# EAGLE board CT_schematic (EAGLE 7.6.0)

Size 100 x 80 mm. Coordinates in mm from the lower left corner, seen from the top.
Outline: 0,0 100,0 100,80 0,80 0,0
Copper layers (1*16): Top 0.035mm / dielectric 1.5mm / Bottom 0.035mm
Design rules "default": minimum track width 10mil, minimum drill 24mil, track to track 8mil, track to pad 8mil, pad to pad 8mil, via to via 8mil, smd to smd 8mil, copper to edge 40mil, drill to drill 8mil, minimum pad ring 10mil, minimum via ring 8mil, stop-mask expansion 4mil, vias tented up to drill 0mil, thermal gap 10mil

## Footprints (pad centres in the part's own frame; a part is rotated, then mirrored left to right if it is on the bottom)
C0603 = smd 0.8 x 0.8: 1 -0.762,0; 2 0.762,0
C0402 = smd 0.5 x 0.5: 1 -0.508,0; 2 0.508,0
C0805 = smd 1.2 x 1.3: 1 -1.016,0; 2 1.016,0
2220 = smd 1.85 x 5.5: 1 -2.55,0; 2 2.55,0
EXV-9H = smd 3.505 x 1.676: 1 -2.857,0; 2 2.857,0
L0603 = smd 0.8 x 0.8: 1 -0.762,0; 2 0.762,0
R0603 = smd 0.8 x 0.8: 1 -0.762,0; 2 0.762,0
DR1040 = smd 1.6 x 3.2: 1 -4.458,0; 2 4.458,0
PJ-037B_PACKAGE = drill 3.7 square: 1 12,0 | drill 3.2 square: 2 6,0
LQFP176 = smd 0.3 x 1.2: 1 -10.75,-12.75; 2 -10.25,-12.75; 3 -9.75,-12.75; 4 -9.25,-12.75; 5 -8.75,-12.75; 6 -8.25,-12.75; 7 -7.75,-12.75; 8 -7.25,-12.75; 9 -6.75,-12.75; 10 -6.25,-12.75; 11 -5.75,-12.75; 12 -5.25,-12.75; 13 -4.75,-12.75; 14 -4.25,-12.75; 15 -3.75,-12.75; 16 -3.25,-12.75; 17 -2.75,-12.75; 18 -2.25,-12.75; 19 -1.75,-12.75; 20 -1.25,-12.75; 21 -0.75,-12.75; 22 -0.25,-12.75; 23 0.25,-12.75; 24 0.75,-12.75; 25 1.25,-12.75; 26 1.75,-12.75; 27 2.25,-12.75; 28 2.75,-12.75; 29 3.25,-12.75; 30 3.75,-12.75; 31 4.25,-12.75; 32 4.75,-12.75; 33 5.25,-12.75; 34 5.75,-12.75; 35 6.25,-12.75; 36 6.75,-12.75; 37 7.25,-12.75; 38 7.75,-12.75; 39 8.25,-12.75; 40 8.75,-12.75; 41 9.25,-12.75; 42 9.75,-12.75; 43 10.25,-12.75; 44 10.75,-12.75; 89 10.75,12.75; 90 10.25,12.75; 91 9.75,12.75; 92 9.25,12.75; 93 8.75,12.75; 94 8.25,12.75; 95 7.75,12.75; 96 7.25,12.75; 97 6.75,12.75; 98 6.25,12.75; 99 5.75,12.75; 100 5.25,12.75; 101 4.75,12.75; 102 4.25,12.75; 103 3.75,12.75; 104 3.25,12.75; 105 2.75,12.75; 106 2.25,12.75; 107 1.75,12.75; 108 1.25,12.75; 109 0.75,12.75; 110 0.25,12.75; 111 -0.25,12.75; 112 -0.75,12.75; 113 -1.25,12.75; 114 -1.75,12.75; 115 -2.25,12.75; 116 -2.75,12.75; 117 -3.25,12.75; 118 -3.75,12.75; 119 -4.25,12.75; 120 -4.75,12.75; 121 -5.25,12.75; 122 -5.75,12.75; 123 -6.25,12.75; 124 -6.75,12.75; 125 -7.25,12.75; 126 -7.75,12.75; 127 -8.25,12.75; 128 -8.75,12.75; 129 -9.25,12.75; 130 -9.75,12.75; 131 -10.25,12.75; 132 -10.75,12.75 | smd 1.2 x 0.3: 45 12.75,-10.75; 46 12.75,-10.25; 47 12.75,-9.75; 48 12.75,-9.25; 49 12.75,-8.75; 50 12.75,-8.25; 51 12.75,-7.75; 52 12.75,-7.25; 53 12.75,-6.75; 54 12.75,-6.25; 55 12.75,-5.75; 56 12.75,-5.25; 57 12.75,-4.75; 58 12.75,-4.25; 59 12.75,-3.75; 60 12.75,-3.25; 61 12.75,-2.75; 62 12.75,-2.25; 63 12.75,-1.75; 64 12.75,-1.25; 65 12.75,-0.75; 66 12.75,-0.25; 67 12.75,0.25; 68 12.75,0.75; 69 12.75,1.25; 70 12.75,1.75; 71 12.75,2.25; 72 12.75,2.75; 73 12.75,3.25; 74 12.75,3.75; 75 12.75,4.25; 76 12.75,4.75; 77 12.75,5.25; 78 12.75,5.75; 79 12.75,6.25; 80 12.75,6.75; 81 12.75,7.25; 82 12.75,7.75; 83 12.75,8.25; 84 12.75,8.75; 85 12.75,9.25; 86 12.75,9.75; 87 12.75,10.25; 88 12.75,10.75; 133 -12.75,10.75; 134 -12.75,10.25; 135 -12.75,9.75; 136 -12.75,9.25; 137 -12.75,8.75; 138 -12.75,8.25; 139 -12.75,7.75; 140 -12.75,7.25; 141 -12.75,6.75; 142 -12.75,6.25; 143 -12.75,5.75; 144 -12.75,5.25; 145 -12.75,4.75; 146 -12.75,4.25; 147 -12.75,3.75; 148 -12.75,3.25; 149 -12.75,2.75; 150 -12.75,2.25; 151 -12.75,1.75; 152 -12.75,1.25; 153 -12.75,0.75; 154 -12.75,0.25; 155 -12.75,-0.25; 156 -12.75,-0.75; 157 -12.75,-1.25; 158 -12.75,-1.75; 159 -12.75,-2.25; 160 -12.75,-2.75; 161 -12.75,-3.25; 162 -12.75,-3.75; 163 -12.75,-4.25; 164 -12.75,-4.75; 165 -12.75,-5.25; 166 -12.75,-5.75; 167 -12.75,-6.25; 168 -12.75,-6.75; 169 -12.75,-7.25; 170 -12.75,-7.75; 171 -12.75,-8.25; 172 -12.75,-8.75; 173 -12.75,-9.25; 174 -12.75,-9.75; 175 -12.75,-10.25; 176 -12.75,-10.75
LGA14R35P5X6_200X200X100 = smd 0.35 x 0.15: 1 -0.8,0.525; 2 -0.8,0.175; 3 -0.8,-0.175; 4 -0.8,-0.525; 8 0.8,-0.525; 9 0.8,-0.175; 10 0.8,0.175; 11 0.8,0.525 | smd 0.15 x 0.35: 5 -0.35,-0.8; 6 0,-0.8; 7 0.35,-0.8; 12 0.35,0.8; 13 0,0.8; 14 -0.35,0.8
TST-110-05-T-D-RA = drill 1 pad 1.7 square: 1 0,0 | drill 1 pad 1.7: 2 0,2.54; 3 2.54,0; 4 2.54,2.54; 5 5.08,0; 6 5.08,2.54; 7 7.62,0; 8 7.62,2.54; 9 10.16,0; 10 10.16,2.54; 11 12.7,0; 12 12.7,2.54; 13 15.24,0; 14 15.24,2.54; 15 17.78,0; 16 17.78,2.54; 17 20.32,0; 18 20.32,2.54; 19 22.86,0; 20 22.86,2.54
TDFN-8/6MM = smd 0.3 x 0.75: 1 0,0; 2 0.5,0; 3 1,0; 4 1.5,0; 5 1.5,3; 6 1,3; 7 0.5,3; 8 0,3
RTL8201FL-VB-CG = smd 0.27 x 1: 1 0,0; 2 0.5,0; 3 1,0; 4 1.5,0; 5 2,0; 6 2.5,0; 7 3,0; 8 3.5,0; 9 4,0; 10 4.5,0; 11 5,0; 12 5.5,0; 25 5.5,8; 26 5,8; 27 4.5,8; 28 4,8; 29 3.5,8; 30 3,8; 31 2.5,8; 32 2,8; 33 1.5,8; 34 1,8; 35 0.5,8; 36 0,8 | smd 1 x 0.27: 13 6.75,1.25; 14 6.75,1.75; 15 6.75,2.25; 16 6.75,2.75; 17 6.75,3.25; 18 6.75,3.75; 19 6.75,4.25; 20 6.75,4.75; 21 6.75,5.25; 22 6.75,5.75; 23 6.75,6.25; 24 6.75,6.75; 37 -1.25,6.75; 38 -1.25,6.25; 39 -1.25,5.75; 40 -1.25,5.25; 41 -1.25,4.75; 42 -1.25,4.25; 43 -1.25,3.75; 44 -1.25,3.25; 45 -1.25,2.75; 46 -1.25,2.25; 47 -1.25,1.75; 48 -1.25,1.25
7498011122R = smd 0.71 x 2.29: 1 -3.545,-3.18; 2 -2.525,-3.18; 3 -1.505,-3.18; 4 -0.485,-3.18; 5 0.535,-3.18; 6 1.555,-3.18; 8 3.595,-3.18; 9 5.635,-3.18; 10 6.655,-3.18; 11 -6.605,-3.18; 12 -5.585,-3.18 | smd 1.4 x 2.54: 13 -8.51,10.2; 14 8.51,10.2 | hole 1.4: -3.5,0; 3.5,0
TH58NVG3S0HBAI4 = smd 0.46 x 0.46: A1 -5.6,2.4; A2 -5.6,1.6; A9 -5.6,-5.6; A10 -5.6,-6.4; B1 -4.8,2.4; B9 -4.8,-5.6; B10 -4.8,-6.4; C3 -4,0.8; C4 -3.2,0.8; C5 -2.4,0.8; C6 -1.6,0.8; C7 -0.8,0.8; C8 0,0.8; D3 -4,0; D4 -3.2,0; D5 -2.4,0; D6 -1.6,0; D7 -0.8,0; D8 0,0; E3 -4,-0.8; E4 -3.2,-0.8; E5 -2.4,-0.8; E6 -1.6,-0.8; E7 -0.8,-0.8; E8 0,-0.8; F3 -4,-1.6; F4 -3.2,-1.6; F5 -2.4,-1.6; F6 -1.6,-1.6; F7 -0.8,-1.6; F8 0,-1.6; G3 -4,-2.4; G4 -3.2,-2.4; G5 -2.4,-2.4; G6 -1.6,-2.4; G7 -0.8,-2.4; G8 0,-2.4; H3 -4,-3.2; H4 -3.2,-3.2; H5 -2.4,-3.2; H6 -1.6,-3.2; H7 -0.8,-3.2; H8 0,-3.2; J3 -4,-4; J4 -3.2,-4; J5 -2.4,-4; J6 -1.6,-4; J7 -0.8,-4; J8 0,-4; K3 -4,-4.8; K4 -3.2,-4.8; K5 -2.4,-4.8; K6 -1.6,-4.8; K7 -0.8,-4.8; K8 0,-4.8; L1 0.8,2.4; L2 0.8,1.6; L9 0.8,-5.6; L10 0.8,-6.4; M1 1.6,2.4; M2 1.6,1.6; M9 1.6,-5.6; M10 1.6,-6.4
ABLS-25.000MHZ-B2F-T = smd 5.6 x 2.8: 1 -3.81,0; 2 5.69,0
ASEK = smd 1.4 x 1: 1 -1.1,-0.8; 2 1.1,-0.8; 3 1.1,0.8; 4 -1.1,0.8
QFN-16_EP = smd 0.805 x 0.3: 1 -1.452,0.75; 2 -1.452,0.25; 3 -1.452,-0.25; 4 -1.452,-0.75; 9 1.452,-0.75; 10 1.452,-0.25; 11 1.452,0.25; 12 1.452,0.75 | smd 0.3 x 0.805: 5 -0.75,-1.452; 6 -0.25,-1.452; 7 0.25,-1.452; 8 0.75,-1.452; 13 0.75,1.452; 14 0.25,1.452; 15 -0.25,1.452; 16 -0.75,1.452 | smd 1.55 x 1.55: 17 0,0
SON-6 = smd 0.55 x 0.3: 1 -0.355,0.5 | smd 0.52 x 0.3: 2 -0.37,0; 3 -0.37,-0.5; 4 0.37,-0.5; 5 0.37,0; 6 0.37,0.5
SW_4-1437565-2 = smd 1.4 x 2.1: 1 -2.23,4.55; 2 -2.23,-4.55; 3 2.23,4.55; 4 2.23,-4.55
LGM67K-G1J2-24-Z = smd 0.8 x 1.4: A -2,0; C 0,0
NC7SZ125M5X = smd 1.3 x 0.7: 1 -1.3,0.95; 2 -1.3,0; 3 -1.3,-0.95; 4 1.3,-0.95; 5 1.3,0.95

## Placement (x,y rotation side)
C1  1e-06  [C0603]  -66.04,76.2 0 top  (outside the outline)
C2  1e-07  [C0603]  -69.85,76.2 0 top  (outside the outline)
C3  1e-07  [C0603]  -73.66,76.2 0 top  (outside the outline)
C4  1e-07  [C0603]  -77.47,76.2 0 top  (outside the outline)
C5  1e-07  [C0603]  -81.28,76.2 0 top  (outside the outline)
C6  1e-07  [C0603]  -85.09,76.2 0 top  (outside the outline)
C7  1e-07  [C0603]  -15.24,81.28 0 top  (outside the outline)
C8  1e-07  [C0603]  -19.05,81.28 0 top  (outside the outline)
C9  1e-07  [C0603]  -22.86,81.28 0 top  (outside the outline)
C10  1e-07  [C0603]  -26.67,81.28 0 top  (outside the outline)
C11  1e-07  [C0603]  -30.48,81.28 0 top  (outside the outline)
C12  1e-07  [C0603]  -34.29,81.28 0 top  (outside the outline)
C13  1e-07  [C0603]  -38.1,81.28 0 top  (outside the outline)
C14  1e-07  [C0603]  -41.91,81.28 0 top  (outside the outline)
C15  1e-07  [C0603]  -45.72,81.28 0 top  (outside the outline)
C16  1e-07  [C0603]  -49.53,81.28 0 top  (outside the outline)
C17  1e-07  [C0603]  -53.34,81.28 0 top  (outside the outline)
C18  4.7e-06  [C0603]  -54.61,76.2 0 top  (outside the outline)
C19  2.2e-06  [C0603]  -58.42,76.2 0 top  (outside the outline)
C20  2.2e-06  [C0603]  -62.23,76.2 0 top  (outside the outline)
C21  1e-08  [C0603]  -57.15,81.28 0 top  (outside the outline)
C22  1e-06  [C0603]  -60.96,81.28 0 top  (outside the outline)
C23  1e-11  [C0402]  -19.05,91.44 0 top  (outside the outline)
C24  1e-11  [C0402]  -22.86,91.44 0 top  (outside the outline)
C25  1e-07  [C0402]  -26.67,91.44 0 top  (outside the outline)
C26  1e-07  [C0402]  -30.48,91.44 0 top  (outside the outline)
C27  1e-07  [C0402]  -34.29,91.44 0 top  (outside the outline)
C28  1e-08  [C0402]  -38.1,91.44 0 top  (outside the outline)
C29  2.2e-08  [C0402]  -80.01,86.36 0 top  (outside the outline)
C30  1e-06  [C0603]  -64.77,81.28 0 top  (outside the outline)
C31  1e-07  [C0402]  -41.91,91.44 0 top  (outside the outline)
C32  1e-08  [C0402]  -45.72,91.44 0 top  (outside the outline)
C33  1e-06  [C0603]  -68.58,81.28 0 top  (outside the outline)
C34  1e-07  [C0402]  -49.53,91.44 0 top  (outside the outline)
C35  1e-08  [C0402]  -53.34,91.44 0 top  (outside the outline)
C36  1e-07  [C0402]  -57.15,91.44 0 top  (outside the outline)
C37  1e-07  [C0402]  -60.96,91.44 0 top  (outside the outline)
C38  2.7e-11  [C0402]  -83.82,86.36 0 top  (outside the outline)
C39  2.7e-11  [C0402]  -15.24,91.44 0 top  (outside the outline)
C40  1e-05  [C0805]  -76.2,63.5 0 top  (outside the outline)
C41  1e-07  [C0402]  -64.77,91.44 0 top  (outside the outline)
C42  1e-07  [C0402]  -68.58,91.44 0 top  (outside the outline)
C43  1e-08  [C0402]  -72.39,91.44 0 top  (outside the outline)
C44  1e-05  [C0805]  -81.28,63.5 0 top  (outside the outline)
C45  1e-06  [C0603]  -72.39,81.28 0 top  (outside the outline)
C46  1e-07  [C0402]  -76.2,91.44 0 top  (outside the outline)
C47  6.8e-05  [2220]  -31.75,48.26 0 top  (outside the outline)
C48  1e-07  [C0402]  -80.01,91.44 0 top  (outside the outline)
C49  0.0001  [EXV-9H]  -38.1,57.15 0 top  (outside the outline)
C50  0.0001  [EXV-9H]  -49.53,57.15 0 top  (outside the outline)
C51  1e-08  [C0402]  -83.82,91.44 0 top  (outside the outline)
C52  1e-08  [C0402]  -15.24,96.52 0 top  (outside the outline)
C53  1e-08  [C0402]  -19.05,96.52 0 top  (outside the outline)
F1  240.0  [L0603]  -76.2,81.28 0 top  (outside the outline)
I1  97.0  [R0603]  -80.01,81.28 0 top  (outside the outline)
I5  3.8e-06  [DR1040]  -71.12,34.29 0 top  (outside the outline)
J1  PJ-037B  [PJ-037B_PACKAGE]  -44.45,35.56 0 top  (outside the outline)
R2  1000.0  [R0603]  -83.82,81.28 0 top  (outside the outline)
R4  4700.0  [R0603]  -15.24,86.36 0 top  (outside the outline)
R5  4700.0  [R0603]  -19.05,86.36 0 top  (outside the outline)
R6  2200.0  [R0603]  -22.86,86.36 0 top  (outside the outline)
R7  2200.0  [R0603]  -26.67,86.36 0 top  (outside the outline)
R8  2200.0  [R0603]  -30.48,86.36 0 top  (outside the outline)
R9  2200.0  [R0603]  -34.29,86.36 0 top  (outside the outline)
R10  2200.0  [R0603]  -38.1,86.36 0 top  (outside the outline)
R11  2200.0  [R0603]  -41.91,86.36 0 top  (outside the outline)
R12  10000.0  [R0603]  -30.48,71.12 0 top  (outside the outline)
R13  10000.0  [R0603]  -35.56,71.12 0 top  (outside the outline)
R14  10000.0  [R0603]  -40.64,71.12 0 top  (outside the outline)
R15  10000.0  [R0603]  -45.72,71.12 0 top  (outside the outline)
R16  0.1  [R0603]  -45.72,86.36 0 top  (outside the outline)
R17  0.1  [R0603]  -49.53,86.36 0 top  (outside the outline)
R18  200.0  [R0603]  -53.34,86.36 0 top  (outside the outline)
R19  200.0  [R0603]  -57.15,86.36 0 top  (outside the outline)
R20  2490.0  [R0603]  -60.96,86.36 0 top  (outside the outline)
R21  4700.0  [R0603]  -64.77,86.36 0 top  (outside the outline)
R22  10000.0  [R0603]  -50.8,71.12 0 top  (outside the outline)
R23  10000.0  [R0603]  -55.88,71.12 0 top  (outside the outline)
R24  10000.0  [R0603]  -60.96,71.12 0 top  (outside the outline)
R25  10000.0  [R0603]  -66.04,71.12 0 top  (outside the outline)
R26  10000.0  [R0603]  -71.12,71.12 0 top  (outside the outline)
R27  10000.0  [R0603]  -76.2,71.12 0 top  (outside the outline)
R28  10000.0  [R0603]  -81.28,71.12 0 top  (outside the outline)
R29  10000.0  [R0603]  -15.24,76.2 0 top  (outside the outline)
R30  10000.0  [R0603]  -20.32,76.2 0 top  (outside the outline)
R31  10000.0  [R0603]  -25.4,76.2 0 top  (outside the outline)
R32  10000.0  [R0603]  -30.48,76.2 0 top  (outside the outline)
R33  20000.0  [R0603]  -35.56,76.2 0 top  (outside the outline)
R34  91000.0  [R0603]  -40.64,76.2 0 top  (outside the outline)
R35  300000.0  [R0603]  -15.24,71.12 0 top  (outside the outline)
R36  10000.0  [R0603]  -45.72,76.2 0 top  (outside the outline)
R37  10000.0  [R0603]  -50.8,76.2 0 top  (outside the outline)
R38  9100.0  [R0603]  -68.58,86.36 0 top  (outside the outline)
R39  680000.0  [R0603]  -20.32,71.12 0 top  (outside the outline)
R40  120000.0  [R0603]  -25.4,71.12 0 top  (outside the outline)
U1  STM32F417IGT6  [LQFP176]  -45.72,13.97 0 top  (outside the outline)
U2  BMC150  [LGA14R35P5X6_200X200X100]  -53.34,64.77 0 top  (outside the outline)
U3  TST-110-05-T-D-RA  [TST-110-05-T-D-RA]  -69.85,44.45 0 top  (outside the outline)
U4  24AA02T-I/MNY  [TDFN-8/6MM]  -24.13,46.99 0 top  (outside the outline)
U5  RTL8201FL-VB-CG  [RTL8201FL-VB-CG]  -27.94,31.75 0 top  (outside the outline)
U6  7498011122R  [7498011122R]  -22.86,7.62 0 top  (outside the outline)
U7  TH58NVG3S0HBAI4  [TH58NVG3S0HBAI4]  -69.85,10.16 0 top  (outside the outline)
U8  ABLS-25.000MHZ-B2F-T  [ABLS-25.000MHZ-B2F-T]  -68.58,57.15 0 top  (outside the outline)
U9  ABLS-25.000MHZ-B2F-T  [ABLS-25.000MHZ-B2F-T]  -26.67,64.77 0 top  (outside the outline)
U10  ASEK-32.768KHz-ECST  [ASEK]  -29.21,57.15 0 top  (outside the outline)
U11  LTC3601EUD#PBF  [QFN-16_EP]  -73.66,86.36 0 top  (outside the outline)
U12  TPS3895ADRYR  [SON-6]  -21.59,95.25 0 top  (outside the outline)
U13  4-1437565-2  [SW_4-1437565-2]  -60.96,34.29 0 top  (outside the outline)
U14  Q65110A2395  [LGM67K-G1J2-24-Z]  -38.1,64.77 0 top  (outside the outline)
U15  nc7sz125m5x  [NC7SZ125M5X]  -57.15,63.5 0 top  (outside the outline)
U16  nc7sz125m5x  [NC7SZ125M5X]  -63.5,63.5 0 top  (outside the outline)
U17  nc7sz125m5x  [NC7SZ125M5X]  -69.85,63.5 0 top  (outside the outline)

## Library data of the parts
C1-C53 F1 I1 I5 J1 R2 R4-R40 U1-U17 = circuit_tree

## Nets
CLK_CRYSTAL_U1_29: C23.1 U1.29 U8.1
CLK_CRYSTAL_U1_30: C24.1 U1.30 U8.2
CLK_CRYSTAL_U5_42: C39.1 U5.42 U9.1
CLK_CRYSTAL_U5_43: C38.1 U5.43 U9.2
CLK_U1_9: U1.9 U10.3
GND: C1.2 C2.2 C3.2 C4.2 C5.2 C6.2 C7.2 C8.2 C9.2 C10.2 C11.2 C12.2 C13.2 C14.2 C15.2 C16.2 C17.2 C18.2 C19.2 C20.2 C21.2 C22.2 C23.2 C24.2 C25.2 C26.2 C27.2 C28.2 C29.2 C30.2 C31.2 C32.2 C33.2 C34.2 C35.2 C36.2 C37.2 C38.2 C39.2 C40.2 C41.2 C42.2 C43.2 C44.2 C45.2 C47.1 C47.2 C48.2 C49.2 C50.2 C51.2 C52.2 C53.2 J1.2 R2.2 R13.2 R16.2 R17.2 R20.2 R22.2 R24.2 R25.2 R26.2 R33.2 R35.2 R38.2 R40.2 U1.14 U1.22 U1.37 U1.48 U1.61 U1.71 U1.90 U1.102 U1.113 U1.126 U1.135 U1.148 U1.158 U2.1 U2.6 U2.7 U2.9 U3.4 U3.6 U3.8 U3.10 U3.12 U3.14 U3.16 U3.18 U3.20 U4.4 U5.7 U5.20 U5.33 U5.47 U6.11 U7.C5 U7.K3 U7.K8 U10.2 U11.1 U11.9 U11.17 U12.2 U14.C U15.2 U15.3 U16.1 U16.3 U17.1 U17.3
NET_U1_16: R9.1 U1.16 U4.5
NET_U1_17: R8.1 U1.17 U4.6
NET_U1_31: R5.1 U1.31 U17.4
NET_U1_33: R10.1 U1.33 U5.30
NET_U1_39: C21.1 C22.1 F1.1 U1.38 U1.39
NET_U1_42: R11.1 U1.42 U5.31
NET_U1_81: C19.1 U1.81
NET_U1_125: C20.1 U1.125
NET_U1_164: R6.1 U1.164 U2.11
NET_U1_165: R7.1 U1.165 U2.14
NET_U1_166: R13.1 U1.166
NET_U1_171: R12.1 U1.171
NET_U1_175: U14.A
NET_U1_176: U13.3 U13.4
NET_U5_6: C30.1 C31.1 C32.1 I1.1 U5.6 U5.41
NET_U5_10: R25.1 U5.10
NET_U5_28: U5.28
NET_U5_29: R4.1 U5.29 U16.4
NET_U5_32: R21.1 U5.32
NET_U5_34: R23.1 U5.34
NET_U5_35: R24.1 U5.35
NET_U5_40: C37.1 U5.40
NET_U5_46: R20.1 U5.46
NET_U5_48: C36.1 U5.48
NET_U6_1: U5.1 U6.1
NET_U6_3: U5.2 U6.3
NET_U6_4: U5.4 U6.4
NET_U6_5: C29.1 U6.2 U6.5
NET_U6_6: U5.5 U6.6
NET_U6_8: R17.1 U6.8
NET_U6_10: R18.1 U6.10
NET_U6_12: R19.1 U6.12
NET_U6_13: R16.1 U6.13 U6.14
NET_U6_34: R18.2
NET_U6_35: R19.2
NET_U7_C3: R31.1 U7.C3
NET_U11_3: C46.2 I5.1 U11.3 U11.4
NET_U11_6: C46.1 U11.6
NET_U11_7: C45.1 U11.7 U11.12
NET_U11_10: R35.1 U11.10
NET_U11_11: R33.1 R34.1 U11.11
NET_U11_14: U11.14
NET_U11_ATNET_3: I5.2 R34.2
NET_U12_1: R37.1 R38.1 U12.1
NET_U12_3: R39.2 R40.1 U12.3
NET_U12_4: R36.1 U12.4 U15.4 U16.2 U17.2
NET_U13_1: R2.1 U13.1 U13.2
PROC_ETH_COL: U1.44 U5.38
PROC_ETH_CRS: U1.40 U5.36
PROC_ETH_RX_CLK: U1.41 U5.19
PROC_ETH_RX_DV: R22.1 U1.53 U5.13
PROC_ETH_RX_ER: R27.1 U1.12 U5.39
PROC_ETH_RXD0: U1.54 U5.14
PROC_ETH_RXD1: U1.55 U5.16
PROC_ETH_RXD2: U1.56 U5.17
PROC_ETH_RXD3: R26.1 U1.57 U5.18
PROC_ETH_TX_CLK: U1.35 U5.22
PROC_ETH_TX_EN: U1.80 U5.27
PROC_ETH_TXD0: U1.92 U5.23
PROC_ETH_TXD1: U1.93 U5.24
PROC_ETH_TXD2: U1.34 U5.25
PROC_ETH_TXD3: U1.1 U5.26
PROC_FSMC_A16: U1.99 U7.D5
PROC_FSMC_A17: U1.100 U7.C4
PROC_FSMC_D0: U1.104 U7.H4
PROC_FSMC_D1: U1.105 U7.J4
PROC_FSMC_D2: U1.142 U7.K4
PROC_FSMC_D3: U1.143 U7.K5
PROC_FSMC_D4: U1.68 U7.K6
PROC_FSMC_D5: U1.69 U7.J7
PROC_FSMC_D6: U1.70 U7.K7
PROC_FSMC_D7: U1.73 U7.J8
PROC_FSMC_INT2: R32.1 U1.110 U7.C8
PROC_FSMC_NCE2: R28.1 U1.151 U7.C6
PROC_FSMC_NOE: R29.1 U1.146 U7.D4
PROC_FSMC_NWE: R30.1 U1.147 U7.C7
PROC_SYS_JTCK_SWCLK: U1.137 U3.9
PROC_SYS_JTDO_SWO: U1.161 U3.13
PROC_SYS_JTMS_SWDIO: U1.124 U3.7
RST_OUT_U3_SRESET_B: R15.1 U3.15 U15.1
VCC_S1_13V5: C44.1 C49.1 C50.1 J1.1 U11.15 U11.16
VCC_TIER1_3V3: C1.1 C2.1 C3.1 C4.1 C5.1 C6.1 C7.1 C8.1 C9.1 C10.1 C11.1 C12.1 C13.1 C14.1 C15.1 C16.1 C17.1 C18.1 C25.1 C26.1 C27.1 C28.1 C33.1 C34.1 C35.1 C40.1 C41.1 C42.1 C43.1 C47.2 C48.1 C51.1 C52.1 C53.1 F1.2 I1.2 I5.2 R4.2 R5.2 R6.2 R7.2 R8.2 R9.2 R10.2 R11.2 R12.2 R14.1 R14.2 R15.2 R21.2 R23.2 R27.2 R28.2 R29.2 R30.2 R31.2 R32.2 R34.2 R36.2 R37.2 R39.1 U1.6 U1.15 U1.23 U1.36 U1.49 U1.62 U1.72 U1.82 U1.91 U1.103 U1.114 U1.127 U1.136 U1.149 U1.159 U1.172 U2.8 U2.10 U2.12 U2.13 U3.1 U4.7 U4.8 U5.15 U5.21 U5.37 U7.H8 U7.J6 U10.4 U11.8 U12.6 U15.5 U16.5 U17.5

## Tracks (layer width: path | path; a pad name or v marks a point on that pad's centre or on a via)
CLK_CRYSTAL_U1_29  (2 unrouted)
CLK_CRYSTAL_U1_30  (2 unrouted)
CLK_CRYSTAL_U5_42  (2 unrouted)
CLK_CRYSTAL_U5_43  (2 unrouted)
CLK_U1_9  (1 unrouted)
GND  (113 unrouted)
NET_U1_16  (2 unrouted)
NET_U1_17  (2 unrouted)
NET_U1_31  (2 unrouted)
NET_U1_33  (2 unrouted)
NET_U1_39  (4 unrouted)
NET_U1_42  (2 unrouted)
NET_U1_81  (1 unrouted)
NET_U1_125  (1 unrouted)
NET_U1_164  (2 unrouted)
NET_U1_165  (2 unrouted)
NET_U1_166  (1 unrouted)
NET_U1_171  (1 unrouted)
NET_U1_176  (1 unrouted)
NET_U5_6  (5 unrouted)
NET_U5_10  (1 unrouted)
NET_U5_29  (2 unrouted)
NET_U5_32  (1 unrouted)
NET_U5_34  (1 unrouted)
NET_U5_35  (1 unrouted)
NET_U5_40  (1 unrouted)
NET_U5_46  (1 unrouted)
NET_U5_48  (1 unrouted)
NET_U6_1  (1 unrouted)
NET_U6_3  (1 unrouted)
NET_U6_4  (1 unrouted)
NET_U6_5  (2 unrouted)
NET_U6_6  (1 unrouted)
NET_U6_8  (1 unrouted)
NET_U6_10  (1 unrouted)
NET_U6_12  (1 unrouted)
NET_U6_13  (2 unrouted)
NET_U7_C3  (1 unrouted)
NET_U11_3  (3 unrouted)
NET_U11_6  (1 unrouted)
NET_U11_7  (2 unrouted)
NET_U11_10  (1 unrouted)
NET_U11_11  (2 unrouted)
NET_U11_ATNET_3  (1 unrouted)
NET_U12_1  (2 unrouted)
NET_U12_3  (2 unrouted)
NET_U12_4  (4 unrouted)
NET_U13_1  (2 unrouted)
PROC_ETH_COL  (1 unrouted)
PROC_ETH_CRS  (1 unrouted)
PROC_ETH_RX_CLK  (1 unrouted)
PROC_ETH_RX_DV  (2 unrouted)
PROC_ETH_RX_ER  (2 unrouted)
PROC_ETH_RXD0  (1 unrouted)
PROC_ETH_RXD1  (1 unrouted)
PROC_ETH_RXD2  (1 unrouted)
PROC_ETH_RXD3  (2 unrouted)
PROC_ETH_TX_CLK  (1 unrouted)
PROC_ETH_TX_EN  (1 unrouted)
PROC_ETH_TXD0  (1 unrouted)
PROC_ETH_TXD1  (1 unrouted)
PROC_ETH_TXD2  (1 unrouted)
PROC_ETH_TXD3  (1 unrouted)
PROC_FSMC_A16  (1 unrouted)
PROC_FSMC_A17  (1 unrouted)
PROC_FSMC_D0  (1 unrouted)
PROC_FSMC_D1  (1 unrouted)
PROC_FSMC_D2  (1 unrouted)
PROC_FSMC_D3  (1 unrouted)
PROC_FSMC_D4  (1 unrouted)
PROC_FSMC_D5  (1 unrouted)
PROC_FSMC_D6  (1 unrouted)
PROC_FSMC_D7  (1 unrouted)
PROC_FSMC_INT2  (2 unrouted)
PROC_FSMC_NCE2  (2 unrouted)
PROC_FSMC_NOE  (2 unrouted)
PROC_FSMC_NWE  (2 unrouted)
PROC_SYS_JTCK_SWCLK  (1 unrouted)
PROC_SYS_JTDO_SWO  (1 unrouted)
PROC_SYS_JTMS_SWDIO  (1 unrouted)
RST_OUT_U3_SRESET_B  (2 unrouted)
VCC_S1_13V5  (5 unrouted)
VCC_TIER1_3V3  (94 unrouted)